# EAGLE board lirc_serial_receiver (EAGLE 6.2)
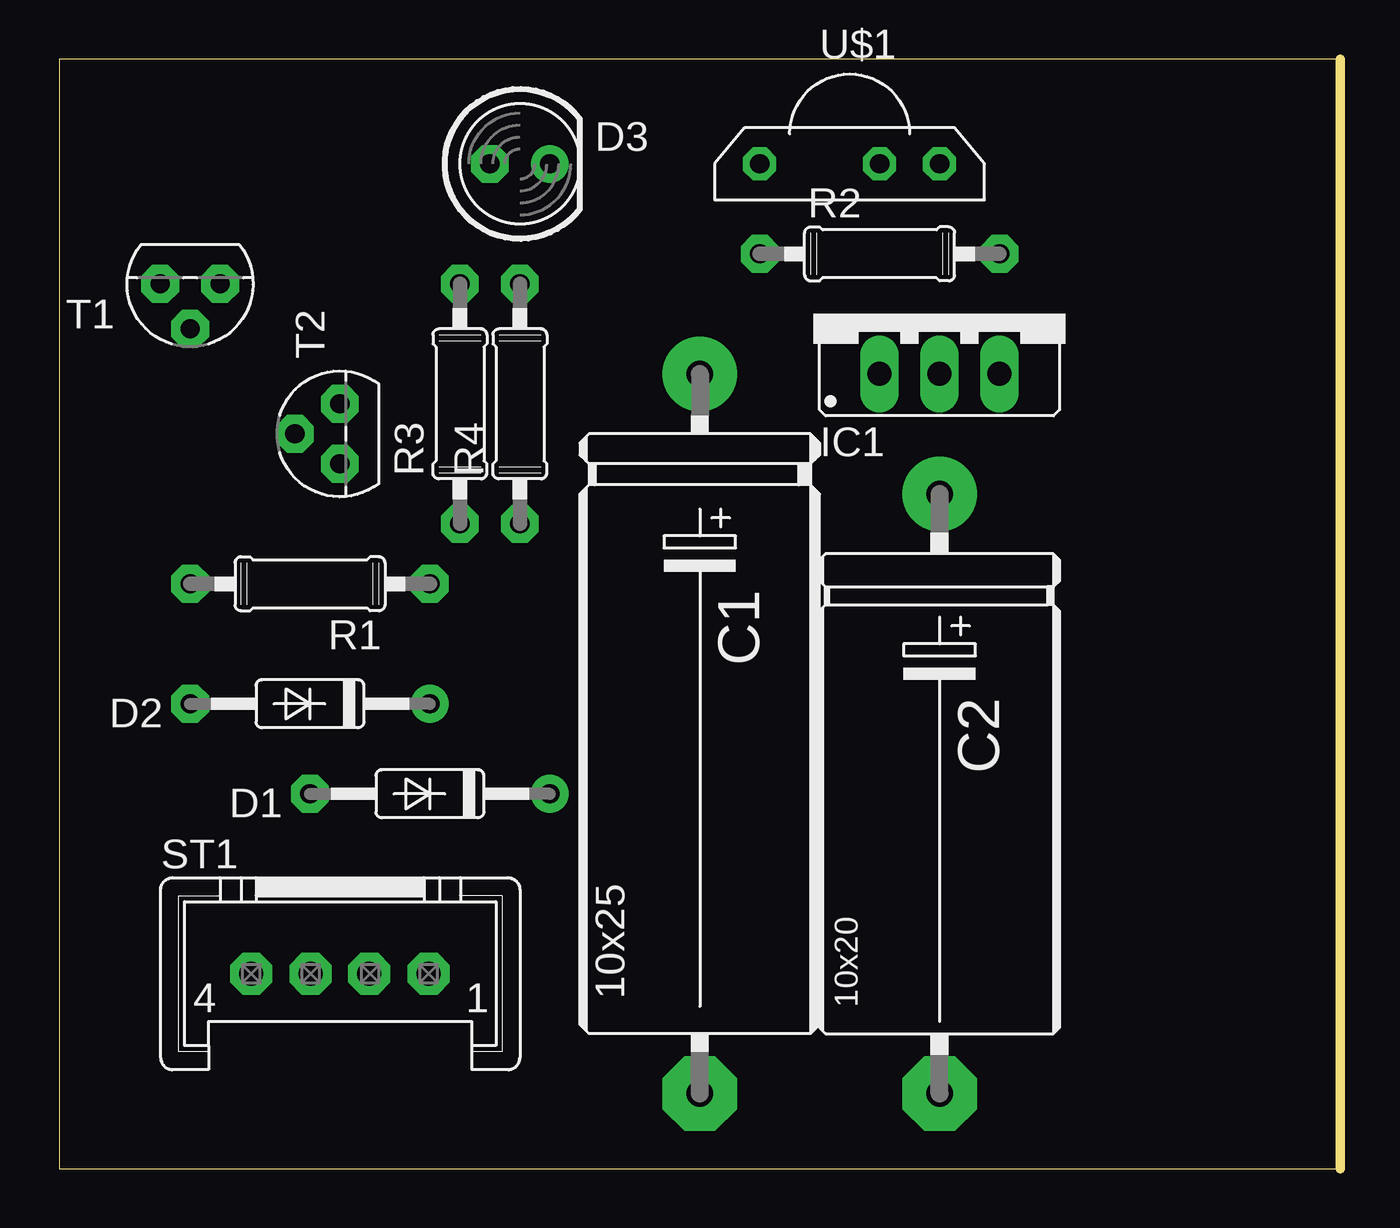
[diagram p0: board, top side]
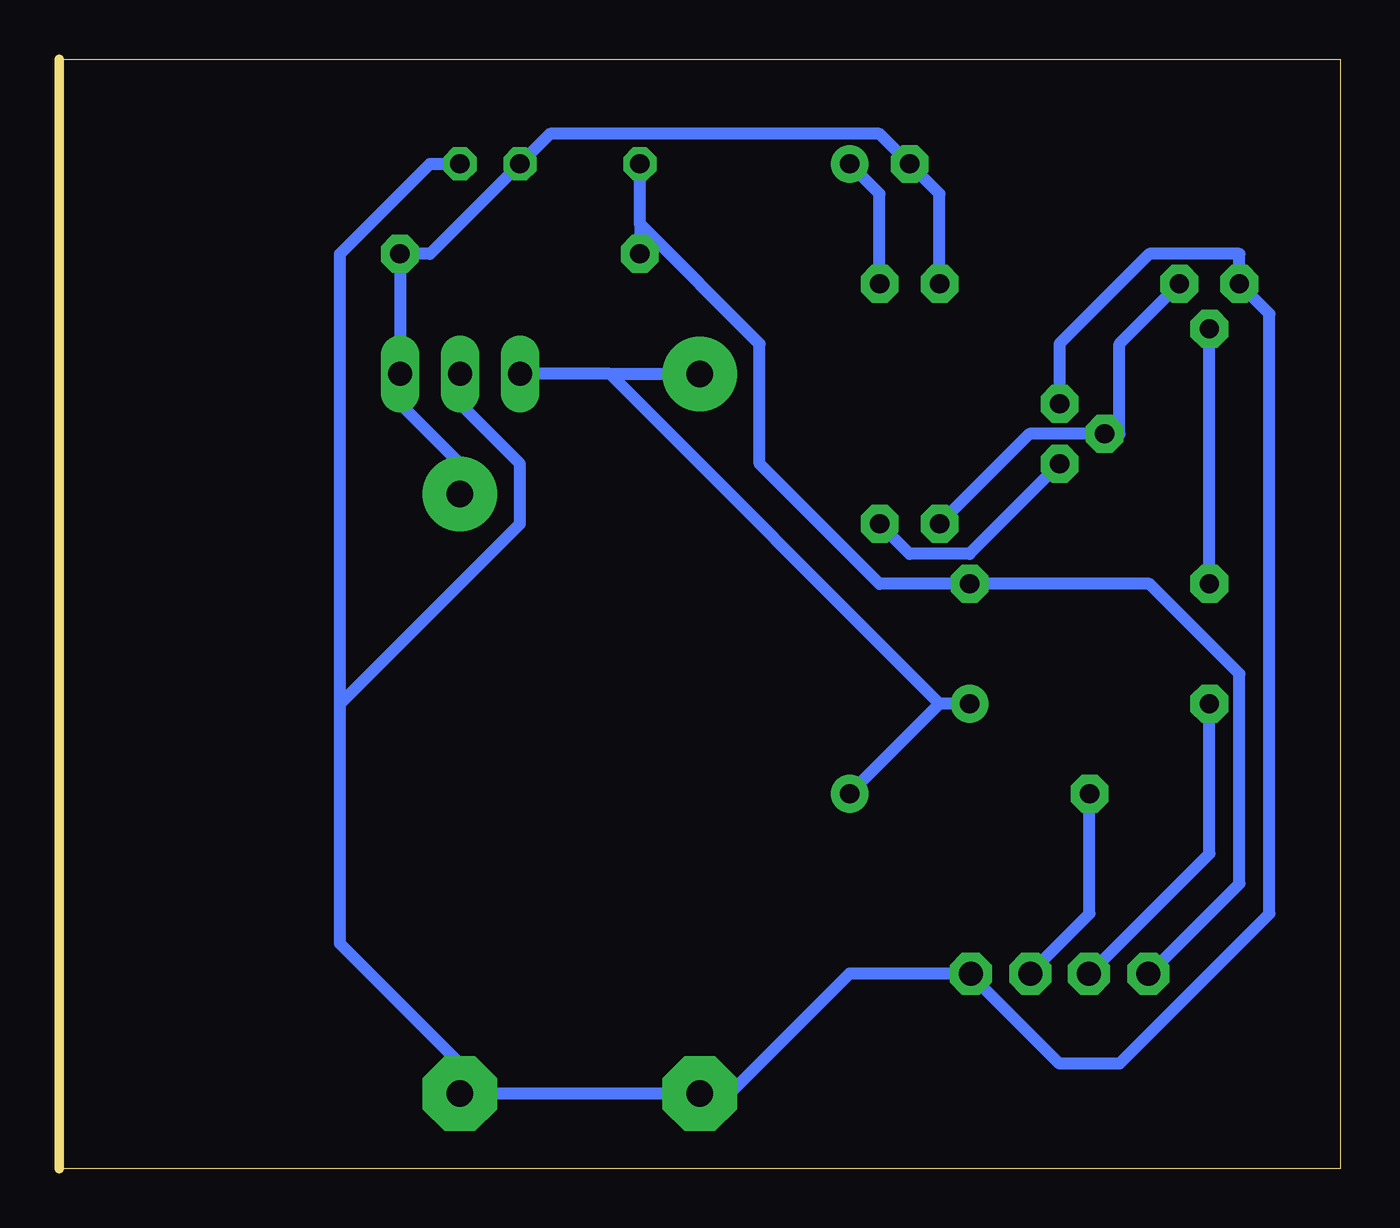
[diagram p1: board, bottom side, seen from below]

Size 54.28 x 46.98 mm. Coordinates in mm from the lower left corner, seen from the top.
Outline: 0,0 54.28,0 54.28,46.98 0,46.98 0,0
Copper layers 16: Bottom 0.035mm
Design rules: minimum track width 10mil, minimum drill 24mil, track to track 8mil, track to pad 8mil, pad to pad 8mil, via to via 8mil, smd to smd 8mil, copper to edge 40mil, drill to drill 8mil, minimum pad ring 10mil, minimum via ring 8mil, stop-mask expansion 4mil, vias tented up to drill 0mil, thermal gap 10mil

## Footprints (pad centres in the part's own frame; a part is rotated, then mirrored left to right if it is on the bottom)
E30-10 = drill 1.118 pad 3.15: + -15.24,0 | drill 1.118 pad 3.15 octagon: - 15.24,0
E25-10 = drill 1.118 pad 3.15: + -12.7,0 | drill 1.118 pad 3.15 octagon: - 12.7,0
DO35-10 = drill 0.813 pad 1.6 octagon: A 5.08,0 | drill 0.813 pad 1.6: K -5.08,0
LED5 = drill 0.813 pad 1.6 octagon: A -1.27,0 | drill 0.813 pad 1.6: K 1.27,0
78XXS = drill 1.016 pad 1.626 long: GND 0,-2.54; IN -2.54,-2.54; OUT 2.54,-2.54
0207/10 = drill 0.813 pad 1.6 octagon: 1 -5.08,0; 2 5.08,0
MSF4 = drill 1.016 pad 1.778 octagon: 1 3.759,-2.54; 2 1.245,-2.54; 3 -1.245,-2.54; 4 -3.759,-2.54
TO92 = drill 0.813 pad 1.6 octagon: 1 1.27,0; 2 0,1.905; 3 -1.27,0
TSOP = drill 0.813 pad 1.397 octagon: + 0,0; - 2.54,0; OUT -5.08,0

## Placement (x,y rotation side)
C1  100u  [E30-10]  27.14,18.41 270 top
C2  47u  [E25-10]  37.3,15.87 270 top
D1  1N4148  [DO35-10]  15.71,15.87 180 top
D2  1N4148  [DO35-10]  10.63,19.68 180 top
D3  LED5  [LED5]  19.52,42.54 0 top
IC1  7805  [78XXS]  37.3,36.19 0 top
R1  10k  [0207/10]  10.63,24.76 180 top
R2  2k2  [0207/10]  34.76,38.73 0 top
R3  10k  [0207/10]  16.98,32.38 90 top
R4  1k  [0207/10]  19.52,32.38 90 top
ST1  Serial  [MSF4]  11.9,10.79 0 top
T1  BC547  [TO92]  5.55,37.46 180 top
T2  BC547  [TO92]  11.9,31.11 90 top
U$1  TSOP  [TSOP]  34.76,42.54 0 top

## Library data of the parts
C1 C2 = polcap
D1 D2 = diode
D3 = led
IC1 = v-reg
R1-R4 = r
ST1 = con-msf
T1 T2 = npn
U$1 = titi

## Nets
GND: C1.- C2.- IC1.GND ST1.1 T1.1 T2.1 U$1.-
N$1: C1.+ D1.K D2.K IC1.IN
N$2: R4.1 T2.3
N$3: R3.1 T1.3 T2.2
N$4: R1.2 T1.2
N$5: D3.K R4.2
N$6: D1.A ST1.2
N$7: D2.A ST1.3
N$8: R1.1 R2.1 ST1.4 U$1.OUT
VCC: C2.+ D3.A IC1.OUT R2.2 R3.2 U$1.+

## Tracks (layer width: path | path; a pad name or v marks a point on that pad's centre or on a via)
GND
  Bottom 0.508: U$1.- 38.57,42.54 42.38,38.73 42.38,19.68 | 42.38,19.68 42.38,9.52 37.3,4.44 C2.- C1.- 25.87,3.17 20.79,8.25 15.71,8.25 | 42.38,19.68 34.76,27.3 34.76,29.84 37.3,32.38 IC1.GND | T2.1 11.9,34.92 8.09,38.73 4.28,38.73 T1.1 3.01,36.19 3.01,10.79 9.36,4.44 11.9,4.44 15.71,8.25 | 15.71,8.25 ST1.1
N$1
  Bottom 0.508: 16.98,19.68 D1.K | D2.K 16.98,19.68 | 30.95,33.65 IC1.IN | 30.95,33.65 C1.+ | 16.98,19.68 30.95,33.65
N$2
  Bottom 0.508: R4.1 18.25,26.03 15.71,26.03 T2.3
N$3
  Bottom 0.508: R3.1 13.17,31.11 T2.2 9.36,31.11 9.36,34.92 T1.3
N$4
  Bottom 0.508: R1.2 T1.2
N$5
  Bottom 0.508: R4.2 19.52,41.27 D3.K
N$6
  Bottom 0.508: D1.A 10.63,10.79 13.17,8.25 ST1.2
N$7
  Bottom 0.508: D2.A 5.55,13.33 10.63,8.25 ST1.3
N$8
  Bottom 0.508: 29.68,40 R2.1 | 29.68,40 U$1.OUT | 29.68,40 24.6,34.92 24.6,29.84 19.52,24.76 R1.1 8.09,24.76 4.28,20.95 4.28,12.06 8.09,8.25 ST1.4
VCC
  Bottom 0.508: C2.+ 37.3,29.84 39.84,32.38 IC1.OUT R2.2 38.57,38.73 U$1.+ 33.49,43.81 19.52,43.81 D3.A 16.98,41.27 R3.2